# Altium PCB SnapItBreakoutRev1.PcbDoc
Units mm, origin at the board's own origin, x right, y up, seen from the top; angles counter-clockwise.
Board outline 36 x 42.1 mm, 2 copper layers (Top Layer, Bottom Layer); 9 components, 47 nets, 77 pads, 0 vias.
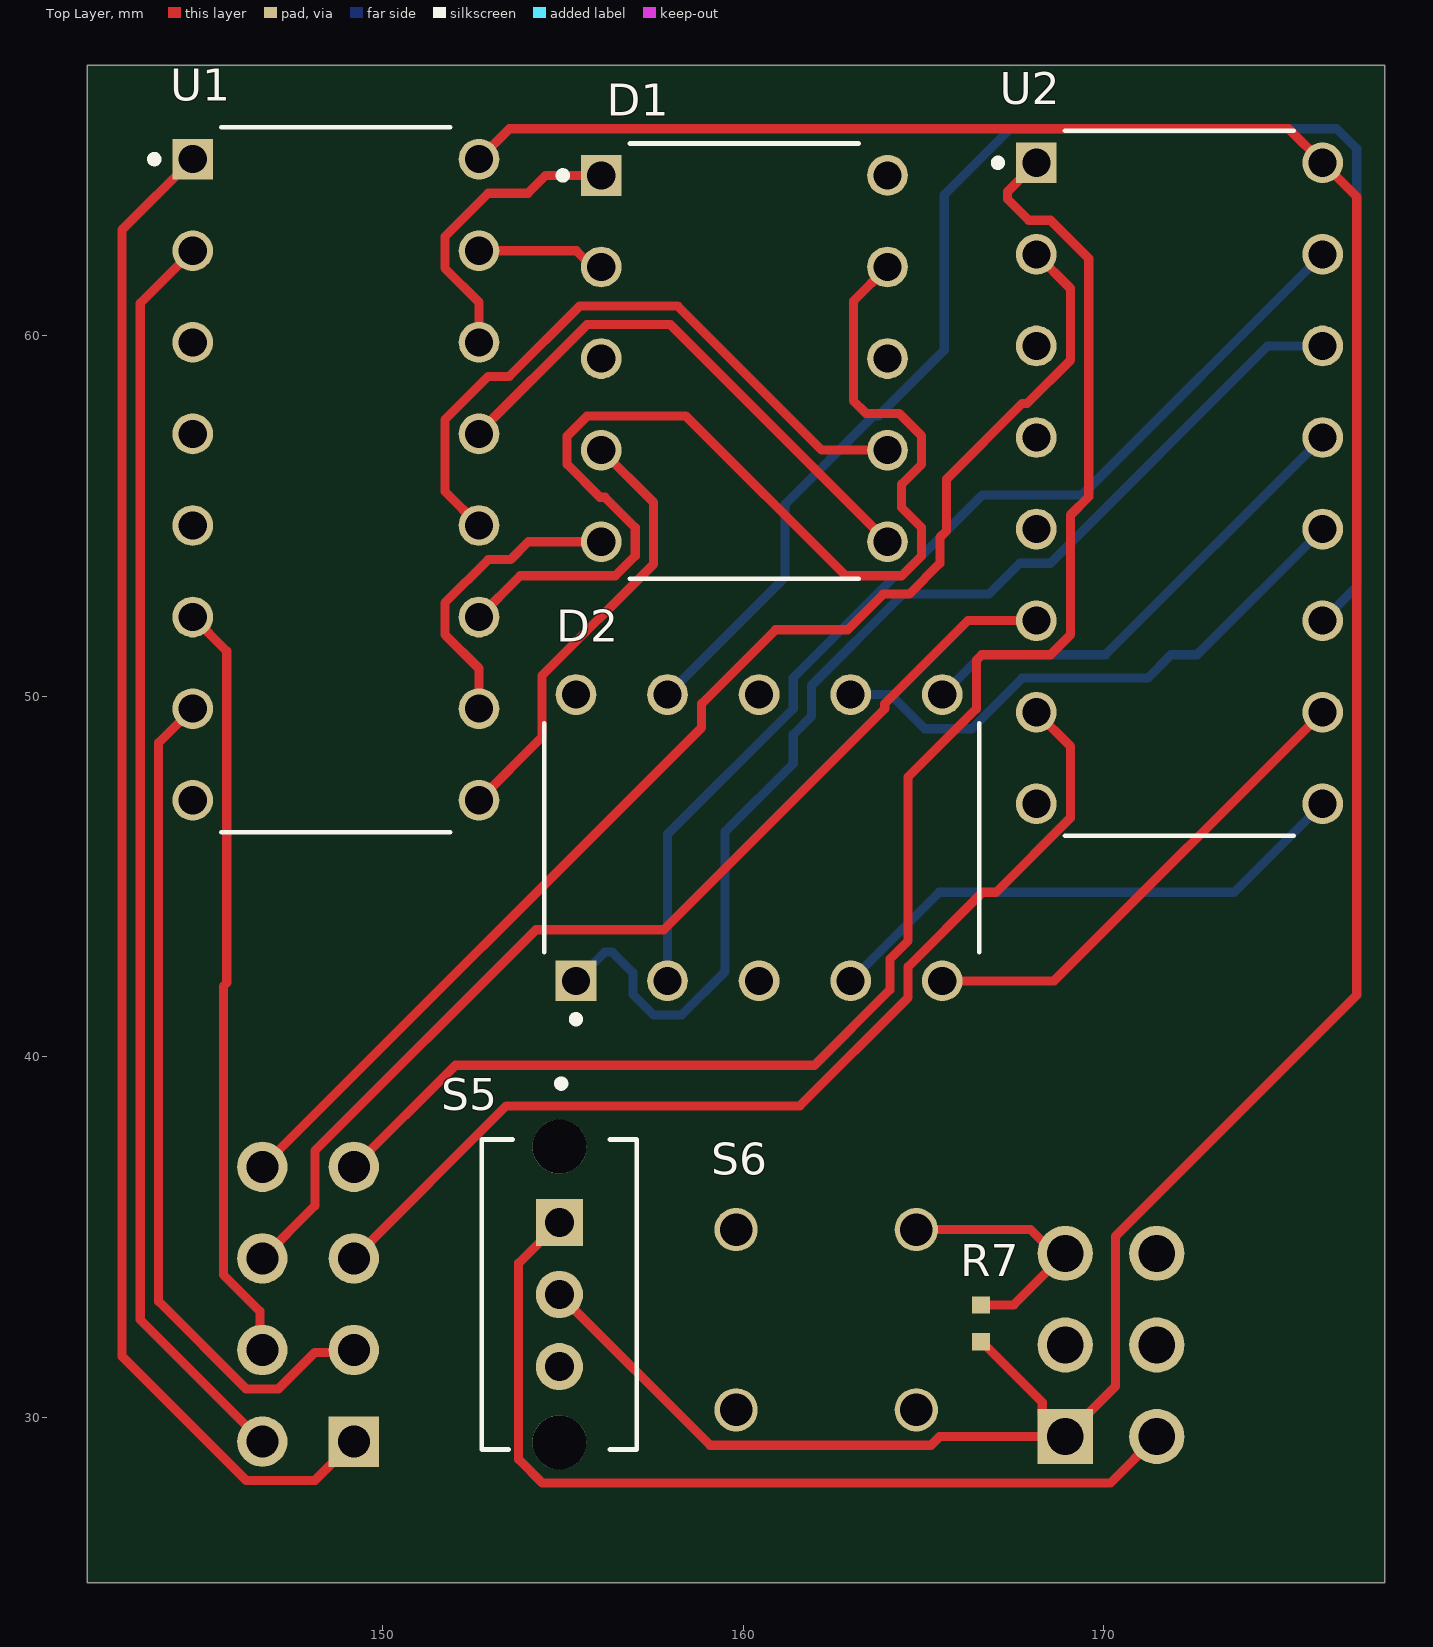
[diagram p0: Top Layer view]
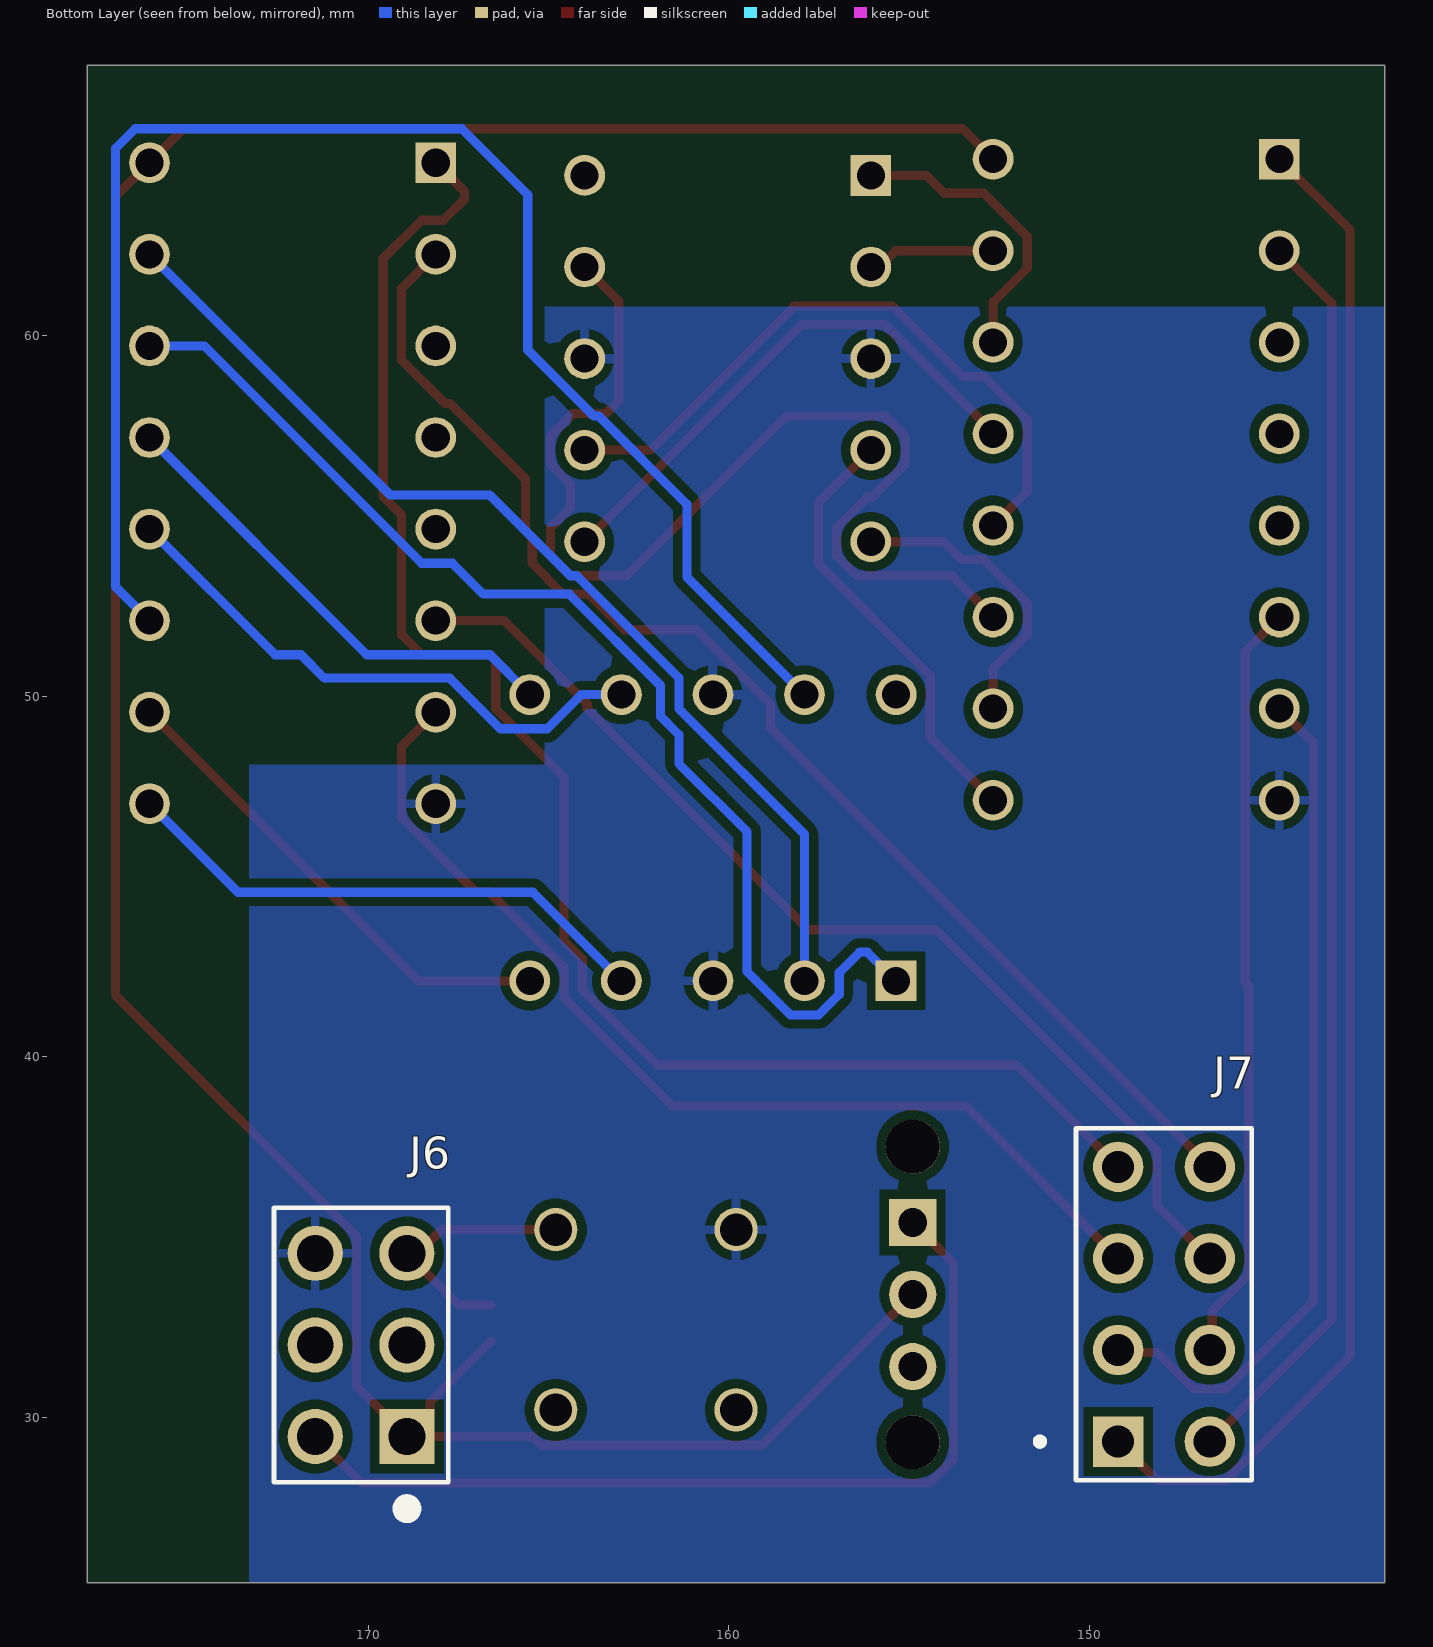
[diagram p1: Bottom Layer view, seen from below]
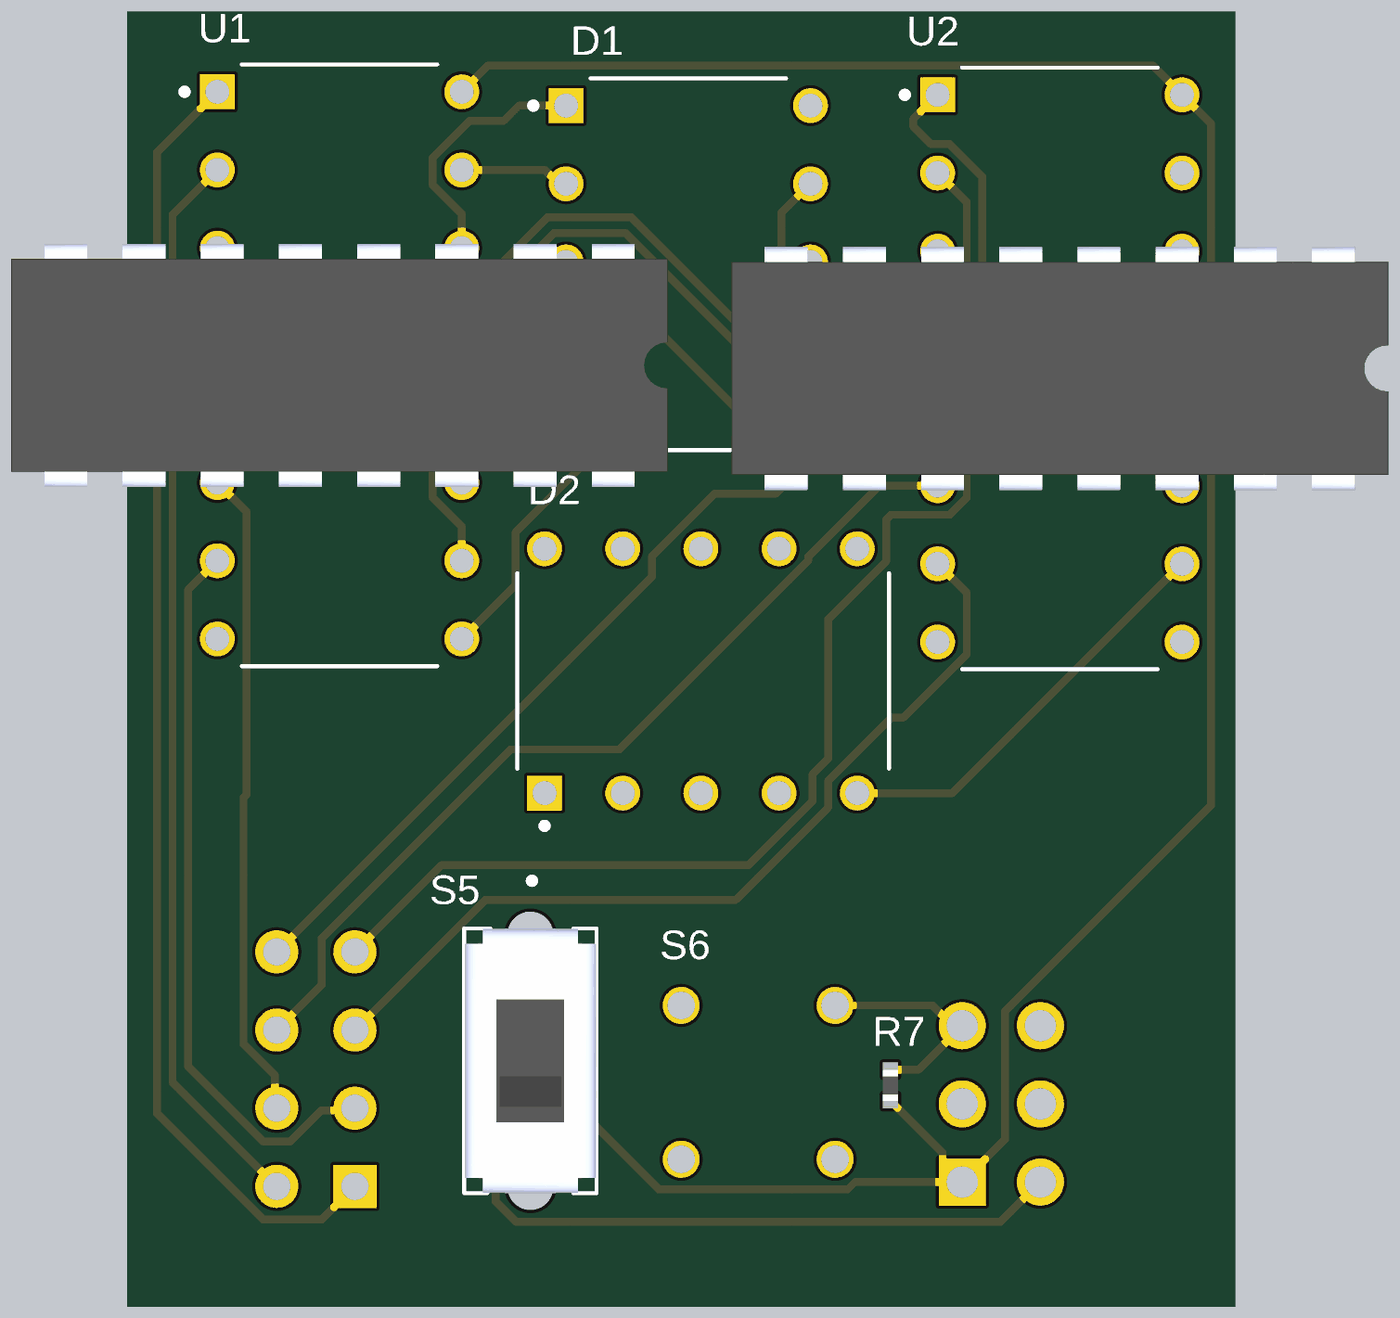
[diagram p2: 3D render of the assembled board from above, using the file's embedded part models]

## Layer stack, top to bottom
Top Solder: solder mask 0.0102, Solder Resist, Dk 3.5
Top Layer: signal copper 0.0356
Dielectric 1: dielectric 0.32, FR-4, Dk 4.8
Bottom Layer: signal copper 0.0356
Bottom Solder: solder mask 0.0102, Solder Resist, Dk 3.5

## Board outline
141.8,25.4 177.8,25.4 177.8,67.5 141.8,67.5

## Design rules (kind name [scope] priority, off if disabled: settings)
Clearance [All] p1: gap=0.254 ignorepadtopadclearanceinfootprint=FALSE
PolygonConnect [All] p1: connectstyle=Relief reliefconductorwidth=0.254 reliefentries=4 polygonreliefangle="90 Angle" airgapwidth=0.254
RoutingVias [All] p1: holewidth=0.711 width=1.27 viastyle="Through Hole" minholewidth=0.711 minwidth=1.27 maxholewidth=0.711 maxwidth=1.27
SolderMaskExpansion [All] p1: expansion=0.102 istentingtop=FALSE
SupplyNets "Schematic Supply Nets" [InNet('GND')] p1: voltage=0.000
Width [All] p1: maxlimit=0.254 minlimit=0.254 preferedwidth=0.254
30 further rules are at their usual default settings.

## Classes and differential pairs
component class SnapItBreakoutRev1: D1 D2 J6 J7 R7 S5 S6

## Components (designator, comment, footprint, x,y, rotation, side; value= is the part's Value field where it differs from the comment)
D1 "7Seg Display" "7 Seg" 160.03,55.55 r0 top
D2 "7Seg Display" "7 Seg" 164.25,46.07 r90 top
J6 "3x2 Header" "3x2 Header" 170.2,32 r90 bottom
J7 "4x2 Header" "4x2 Header" 147.93,33.13 r90 bottom
R7 "1k" 0402Basic 166.6,32.6 r90 top
S5 "CKN9565-ND" "Slide Switch" 154.9,33.4 r270 top
S6 "Button" Pushbutton 162.3,32.7 r180 top
U1 "7SegDecoder" DisplayDecoder 148.7,56 r0 top
U2 "7SegDecoder" DisplayDecoder 172.1,55.9 r0 top

## Footprints (in the part's own frame and the unit in brackets; to place one, negate y for a bottom-side part, rotate by r counter-clockwise, add the part's x,y. Pads: shape width x height; smd on the part's side, far side on the other; paste and mask are expansions set on the pad)
"3x2 Header" [mm]
  rect 1.53x1.53 hole 1.02: 1(-2.54,-1.27)
  round 1.53 hole 1.02: 2(-2.54,1.27) 3(0,-1.27) 4(0,1.27) 5(2.54,-1.27) 6(2.54,1.27)
  silkscreen extent -4.74,-2.41 3.81,2.41
"4x2 Header" [mm]
  rect 1.398x1.398 hole 0.89: 1(-3.81,1.27)
  round 1.398 hole 0.89: 2(-1.27,1.27) 3(1.27,1.27) 4(3.81,1.27) 5(-3.81,-1.27) 6(-1.27,-1.27) 7(1.27,-1.27) 8(3.81,-1.27)
  silkscreen extent -4.88,-2.44 4.88,3.54
"7 Seg" [mm]
  rect 1.13x1.13 hole 0.78: 1(-3.97,8.89)
  round 1.13 hole 0.78: 2(-3.97,6.35) 3(-3.97,3.81) 4(-3.97,1.27) 5(-3.97,-1.27) 6(3.97,-1.27) 7(3.97,1.27) 8(3.97,3.81) 9(3.97,6.35) 10(3.97,8.89)
  silkscreen extent -5.13,-2.3 3.17,9.77
0402Basic [mm]
  rect 0.475x0.5 smd: 1(-0.512,0) 2(0.512,0)
  body extent -0.5,-0.25 0.5,0.25, height 0.35
DisplayDecoder [mm]
  rect 1.13x1.13 / inner round 1.13 / far side rect 1.13x1.13 hole 0.78: 1(-3.97,8.89)
  round 1.13 hole 0.78: 2(-3.97,6.35) 3(-3.97,3.81) 4(-3.97,1.27) 5(-3.97,-1.27) 6(-3.97,-3.81) 7(-3.97,-6.35) 8(-3.97,-8.89) 9(3.97,-8.89) 10(3.97,-6.35) 11(3.97,-3.81) 12(3.97,-1.27) 13(3.97,1.27) 14(3.97,3.81) 15(3.97,6.35) 16(3.97,8.89)
  silkscreen extent -5.13,-9.77 3.17,9.77, body extent -3.95,-10.67 3.95,10.67, height 5.08
Pushbutton [mm]
  round 1.2 hole 0.9: 1(2.5,-2.5) 2(-2.5,-2.5) ""(-2.5,2.5) ""(2.5,2.5)
"Slide Switch" [mm]
  rect 1.308x1.308 / inner round 1.308 / far side rect 1.308x1.308 hole 0.8: 1(-2,0)
  round 1.308 hole 0.8: 2(0,0) 3(2,0)
  round 1.5 hole 1.5 unplated: ""(-4.1,0) ""(4.1,0)
  silkscreen extent -5.95,-2.15 4.3,2.15, body extent -4.3,-2.15 4.3,2.15, height 4.4

## Part data
R7: library part RES
S5: library part Switch

## Nets (pads, with @x,y where several pads share a name; then routed paths per layer and width w, separated by ;. In a path a pad name is that pad's centre, name@x,y a point inside that pad or via, vN(x,y) a via of type N, cw(c..) or ccw(c..) an arc to the next point about the centre after c; other vN are vias at no path point)
1a: D1.6 U1.13 | length 15.1
  Top Layer w0.254: U1.13 152.67,57.308 155.668,60.306 157.974,60.306 D1.6
1b: D1.7 U1.12 | length 18.6
  Top Layer w0.254: U1.12 151.724,55.676 151.724,57.662 152.926,58.864 153.508,58.864 155.458,60.814 158.184,60.814 162.178,56.82 D1.7
1c: D1.9 U1.11 | length 31.5
  Top Layer w0.254: U1.11 153.814,53.334 156.452,53.334 157.006,53.888 157.006,54.672 156.163,55.515 156.027,55.515 155.114,56.428 155.114,57.212 155.668,57.766 158.406,57.766 162.838,53.334 164.392,53.334 164.946,53.888 164.946,54.672 164.392,55.226 164.392,55.874 164.946,56.428 164.946,57.212 164.324,57.834 163.409,57.834 163.054,58.189 163.054,60.954 D1.9
1d: D1.5 U1.10 | length 8.4
  Top Layer w0.254: U1.10 152.67,50.761 151.724,51.707 151.724,52.582 152.926,53.784 153.546,53.784 154.042,54.28 D1.5
1e: D1.4 U1.9 | length 12.3
  Top Layer w0.254: U1.9 154.414,48.854 154.414,50.56 157.514,53.66 157.514,55.366 D1.4
1f: D1.2 U1.15 | length 3.6
  Top Layer w0.254: U1.15 155.373,62.35 155.823,61.9 D1.2
1g: D1.1 U1.14 | length 8.4
  Top Layer w0.254: U1.14 152.67,60.921 151.724,61.867 151.724,62.742 152.926,63.944 154.026,63.944 154.522,64.44 D1.1
1qa: J7.2 U1.7 | length 23.7
  Top Layer w0.254: U1.7 143.784,48.704 143.784,33.209 146.213,30.78 147.107,30.78 148.12,31.793 149.133,31.793 J7.2
1qb: J7.1 U1.1 | length 42.3
  Top Layer w0.254: U1.1 142.768,62.928 142.768,31.685 146.213,28.24 148.12,28.24 J7.1
1qc: J7.5 U1.2 | length 35
  Top Layer w0.254: U1.2 143.276,60.896 143.276,32.704 J7.5
1qd: J7.6 U1.6 | length 21.2
  Top Layer w0.254: U1.6 145.676,51.244 145.676,42.045 145.58,41.949 145.58,33.953 146.593,32.94 146.593,31.927 J7.6
2a: D2.6 U2.13 | length 13.5
  Bottom Layer w0.254: D2.6 166.624,51.144 170.044,51.144 U2.13
2b: D2.7 U2.12 | length 15.8
  Bottom Layer w0.254: D2.7 164.091,50.04 165.037,49.094 166.336,49.094 167.738,50.496 171.218,50.496 171.866,51.144 172.584,51.144 U2.12
2c: D2.9 U2.11 | length 43
  Bottom Layer w0.254: D2.9 161.162,53.302 161.162,55.32 163.608,57.766 163.744,57.766 165.576,59.598 165.576,63.904 167.407,65.736 176.462,65.736 177.016,65.182 177.016,53.036 U2.11
2d: D2.5 U2.10 | length 13.6
  Top Layer w0.254: D2.5 168.62,42.1 U2.10
2e: D2.4 U2.9 | length 15.1
  Bottom Layer w0.254: D2.4 165.435,44.555 173.615,44.555 U2.9
2f: D2.2 U2.15 | length 29.4
  Bottom Layer w0.254: D2.2 157.9,46.162 161.386,49.648 161.386,50.502 164.218,53.334 164.392,53.334 166.634,55.576 169.396,55.576 U2.15
2g: D2.1 U2.14 | length 33
  Bottom Layer w0.254: D2.1 156.157,42.897 156.368,42.897 156.938,42.327 156.938,41.724 157.508,41.154 158.292,41.154 159.494,42.356 159.494,46.234 161.386,48.126 161.386,48.93 161.894,49.438 161.894,50.292 164.428,52.826 166.81,52.826 167.668,53.684 168.522,53.684 174.548,59.71 U2.14
2qa: J7.3 U2.7 | length 28.8
  Top Layer w0.254: J7.3 153.431,38.631 161.567,38.631 164.574,41.638 164.574,42.492 166.637,44.555 167.013,44.555 169.076,46.618 169.076,48.604 U2.7
2qb: J7.4 U2.1 | length 44.9
  Top Layer w0.254: J7.4 152.018,39.758 161.975,39.758 164.066,41.848 164.066,42.702 164.574,43.21 164.574,47.756 166.466,49.648 166.466,50.995 166.615,51.144 168.522,51.144 169.076,51.698 169.076,55.022 169.584,55.53 169.584,62.134 168.522,63.196 167.919,63.196 167.333,63.782 167.333,63.993 U2.1
2qc: J7.8 U2.2 | length 36.7
  Top Layer w0.254: J7.8 158.846,49.126 158.846,49.784 160.898,51.836 162.894,51.836 163.884,52.826 164.602,52.826 165.454,53.678 165.454,54.396 165.64,54.582 165.64,56.018 167.738,58.116 167.874,58.116 169.076,59.318 169.076,61.304 U2.2
2qd: J7.7 U2.6 | length 29.8
  Top Layer w0.254: J7.7 148.12,35.86 148.12,37.387 154.25,43.518 157.796,43.518 163.926,49.648 163.926,49.784 166.232,52.09 U2.6
5Vin: J6.2 S5.1 | length 25.5
  Top Layer w0.254: S5.1 153.769,34.269 153.769,28.832 154.432,28.169 170.179,28.169 J6.2
GameButton: 
GND: D1.3 D1.8 D2.3 D2.8 J6.6 S6.1 U1.8 U2.8
IntoButton: J6.5 R7.2 S6.2 | length 7.3
  Top Layer w0.254: S6.2 167.969,35.2 168.629,34.54 J6.5 167.502,33.112 R7.2
MISO: 
MOSI: 
NetJ4_1: 
NetJ4_2: 
NetJ4_3: 
NetJ4_4: 
NetJ4_5: 
NetJ4_6: 
NetJ4_7: 
NetJ4_8: 
OnesInc: 
OnesReset: 
OutA: 
OutB: 
RST: 
SCK: 
SCL: 
SDA: 
TensInc: 
TensReset: 
VDD: J6.1 R7.1 S5.2 U1.16 U2.16 | length 82.7
  Top Layer w0.254: U1.16 153.516,65.736 175.124,65.736 U2.16 177.016,63.844 177.016,41.707 170.324,35.015 170.324,30.854 J6.1 ; S5.2 159.081,29.219 165.206,29.219 165.447,29.46 J6.1 ; R7.1 166.612,32.088 168.292,30.408 168.292,30.098 J6.1
pads on no net: D1.10 D2.10 J6.3 J6.4 S5. S5.3 S6. U1.3 U1.4 U1.5 U2.3 U2.4 U2.5

## Polygon pours and split planes (outlines as drawn)
GND on Bottom Layer "NONET_L-01_P-001" (solid, pour order 0): 173.3,48.1 165.1,48.1 165.1,60.8 141.8,60.8 141.8,25.4 173.3,25.4